# Altium PCB Pannel3.5x3.PcbDoc (part 4 of 4)
Units mil, origin at the board's own origin, x right, y up, seen from the top; angles counter-clockwise.
Board outline 3543.31 x 2771.65 mil, 4 copper layers (SIGNAL, GROUND, PWR, SIGNAL (Bottom)), stack 61.627 mil thick; 234 components, 186 nets, 894 pads, 439 vias.
Unrouted connection lines stored in the file: 4.
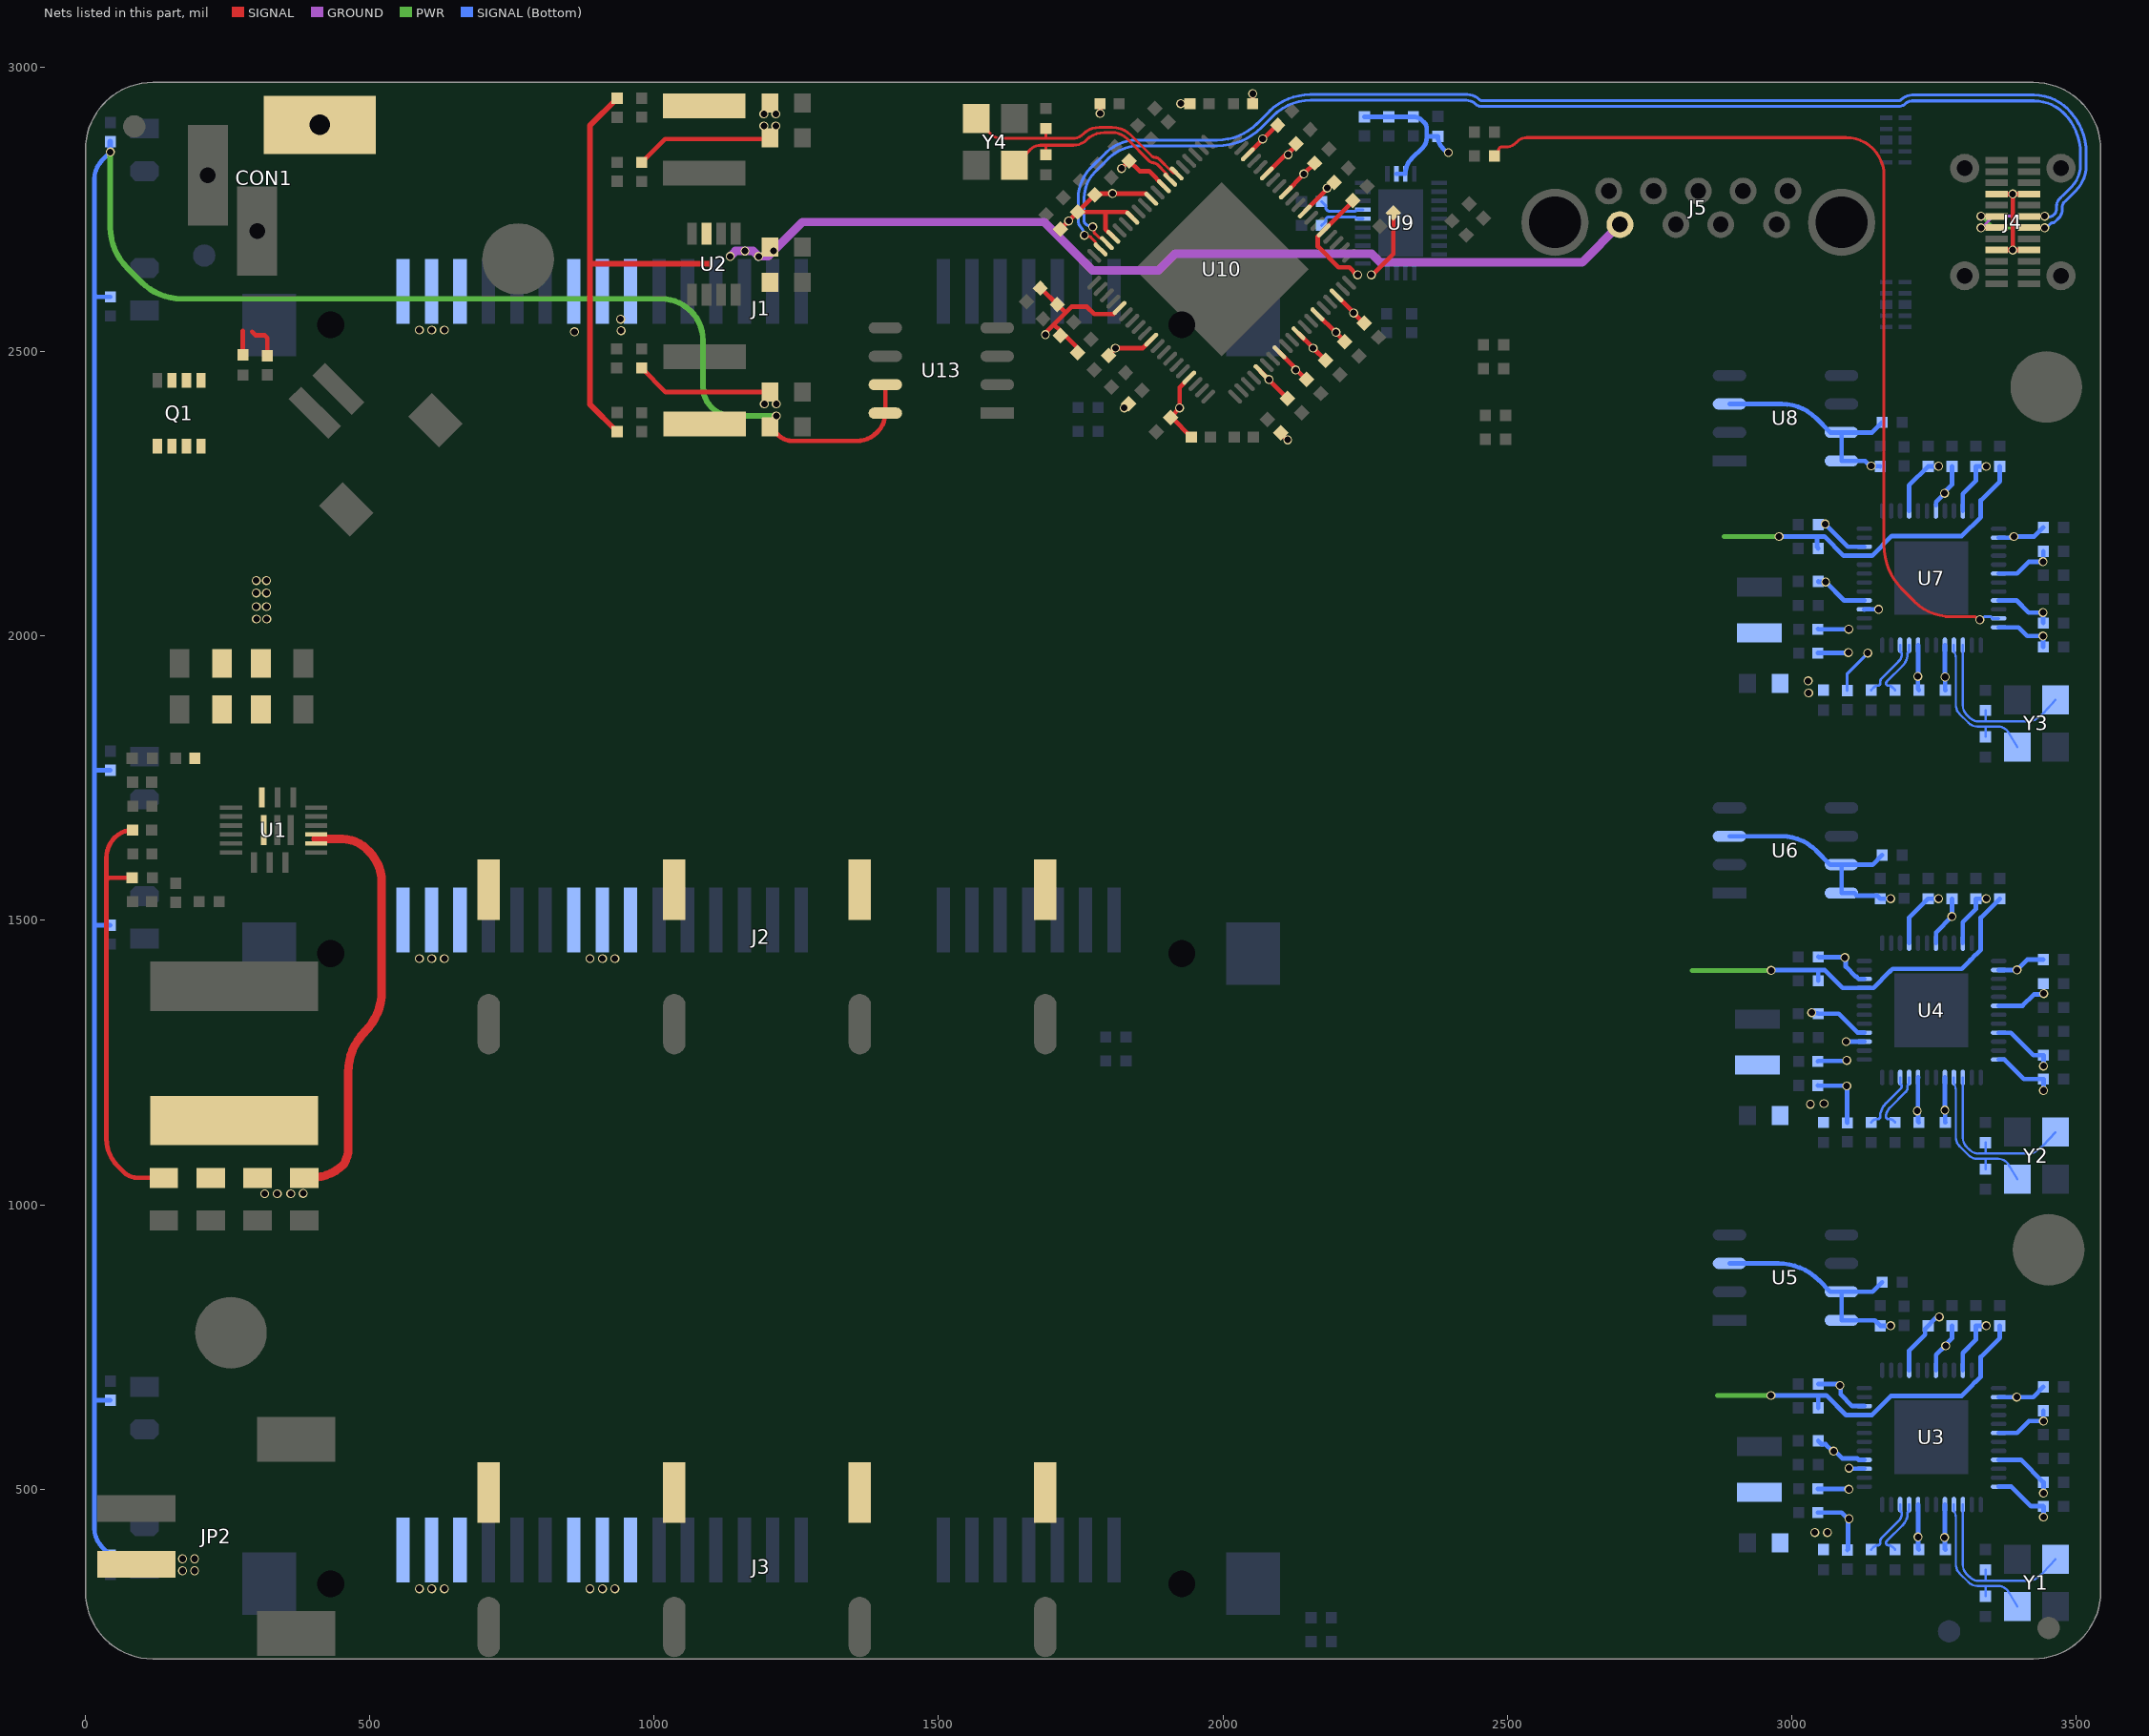
[diagram p6: the nets of this part, all layers, seen from the top]

## Via types
v1: diameter 15.75, hole 11.81, SIGNAL to SIGNAL (Bottom), tented both sides, 439 vias

## Nets (pads, with @x,y where several pads share a name; then routed paths per layer and width w, separated by ;. In a path a pad name is that pad's centre, name@x,y a point inside that pad or via, vN(x,y) a via of type N, cw(c..) or ccw(c..) an arc to the next point about the centre after c; other vN are vias at no path point) (continued)
SSTX4_P: C106.1 U7.23 | length 1664.1
  SIGNAL w5.1: C106.1@2477.72,2844 2483.01,2849.29 ccw(c2478.17,2854.13) 2485.01,2854.13 2485.01,2854.85 cw(c2490.11,2854.85) 2486.5,2858.46 cw(c2490.11,2854.85) 2490.11,2859.95 2497.05,2859.95 ccw(c2497.05,2887.12) 2516.27,2867.91 2518.18,2869.82 cw(c2534.17,2853.83) 2534.17,2876.44 3096.03,2876.44 cw(c3096.03,2809.99) 3142.97,2857.03 cw(c3096.03,2809.99) 3143.02,2856.98 cw(c3096.03,2810) 3162.48,2810 3162.48,2159.9 ccw(c3272.49,2159.9) 3194.64,2082.17 ccw(c3272.49,2159.9) 3194.7,2082.11 3216.08,2060.74 ccw(c3280.73,2125.4) 3280.73,2033.96 3322.79,2033.96 3328.12,2028.63 v1(3331,2028.63)
  SIGNAL (Bottom) w5.1: v1(3331,2028.63) 3333.88,2028.63 3339.21,2033.96 3350.69,2033.96 3353.52,2031.13 U7.23@3364.11,2031.13
SSTX_N: C101.1 U9.21 | length 82.6
  SIGNAL (Bottom) w5.1: C101.1@2173.72,2764 2179.01,2758.71 cw(c2174.17,2753.87) 2181.01,2753.87 ccw(c2187.85,2753.87) 2183.01,2749.03 ccw(c2188.39,2754.41) 2188.39,2746.8 2231.41,2746.8 ccw(c2231.41,2751.63) 2234.82,2748.22 cw(c2238.23,2744.81) 2238.23,2749.63 U9.21@2246.07,2749.63
SSTX_P: C100.1 U9.20 | length 81.1
  SIGNAL (Bottom) w5.1: C100.1@2173.72,2722 2179.45,2727.73 ccw(c2175.67,2731.5) 2181.01,2731.5 2181.01,2731.6 cw(c2186.11,2731.6) 2182.5,2735.21 cw(c2186.11,2731.6) 2186.11,2736.7 2231.41,2736.7 cw(c2231.41,2731.88) 2234.82,2735.29 ccw(c2238.23,2738.7) 2238.23,2733.88 U9.20@2246.07,2733.88
TX1_N: C23.2 U3.33 | length 103.2
  SIGNAL (Bottom) w4.29: C23.2@3182,393.72 3177.04,398.68 ccw(c3170.44,392.08) 3170.44,401.41 cw(c3170.44,405.7) 3167.4,402.67 cw(c3170.44,405.7) 3166.15,405.7 cw(c3170.43,405.7) 3167.4,408.74 3195.31,436.65 ccw(c3174.58,457.38) 3203.9,457.38 cw(c3208.56,457.42) 3205.27,460.71 ccw(c3201.97,464.01) 3206.63,464.01 U3.33@3206.63,472.89
TX1_P: C20.2 U3.34 | length 103.4
  SIGNAL (Bottom) w4.29: C20.2@3140,393.72 3144.96,398.68 cw(c3151.56,392.08) 3151.56,401.41 ccw(c3151.56,405.7) 3154.6,402.67 ccw(c3151.57,405.7) 3155.86,405.7 3155.86,407.83 cw(c3165.29,407.83) 3156,409.5 cw(c3165.29,407.83) 3158.62,414.51 3188.01,443.9 ccw(c3174.49,457.42) 3193.61,457.42 ccw(c3188.95,457.42) 3192.25,460.71 cw(c3195.54,464.01) 3190.88,464.01 U3.34@3190.88,472.89
TX2_N: C22.2 U4.33 | length 104.2
  SIGNAL (Bottom) w4.29: C22.2@3179.12,1147.88 ccw(c3172.53,1141.27) 3172.53,1150.61 3170.44,1150.61 cw(c3170.44,1154.9) 3167.4,1151.86 cw(c3170.44,1154.9) 3166.15,1154.9 cw(c3188.53,1154.9) 3166.15,1155.21 cw(c3188.53,1154.9) 3167.78,1163.29 cw(c3188.53,1154.9) 3172.7,1170.73 3200.92,1198.95 ; C22.2@3179.13,1147.87 C22.2@3182,1145 ; 3200.93,1198.95 ccw(c3193.73,1206.14) 3203.9,1206.14 3203.9,1208.42 cw(c3208.56,1208.42) 3205.27,1211.71 ccw(c3201.97,1215.01) 3206.63,1215.01 U4.33@3206.63,1223.89
TX2_P: C19.2 U4.34 | length 104
  SIGNAL (Bottom) w4.29: C19.2@3140,1145 C19.2@3142.87,1147.87 ; C19.2@3142.88,1147.88 cw(c3149.47,1141.27) 3149.47,1150.61 3151.57,1150.61 ccw(c3151.57,1154.9) 3154.6,1151.86 ccw(c3151.56,1154.9) 3155.86,1154.9 3155.86,1154.96 cw(c3188.37,1154.96) 3155.86,1155.21 cw(c3188.37,1154.96) 3159.14,1169.2 cw(c3188.37,1154.96) 3165.38,1177.96 3192.14,1204.72 ccw(c3188.59,1208.27) 3193.61,1208.27 3193.61,1208.42 ccw(c3188.95,1208.42) 3192.25,1211.71 cw(c3195.54,1215.01) 3190.88,1215.01 U4.34@3190.88,1223.89
TX3_N: C21.2 U7.33 | length 103
  SIGNAL (Bottom) w4.29: C21.2@3182,1905 3177.04,1909.96 ccw(c3170.44,1903.36) 3170.44,1912.7 cw(c3170.44,1916.99) 3167.4,1913.95 cw(c3170.44,1916.99) 3166.15,1916.99 cw(c3170.43,1916.99) 3167.4,1920.02 3195.52,1948.14 ccw(c3175.29,1968.37) 3201.59,1957.1 ccw(c3175.29,1968.37) 3203.9,1968.37 ; 3203.9,1968.42 cw(c3208.56,1968.42) 3205.27,1971.71 ccw(c3201.97,1975.01) 3206.63,1975.01 U7.33@3206.63,1983.89
TX3_P: C18.2 U7.34 | length 103.2
  SIGNAL (Bottom) w4.29: C18.2@3140,1905 3144.96,1909.96 cw(c3151.56,1903.36) 3151.56,1912.7 ccw(c3151.56,1916.99) 3154.6,1913.95 ccw(c3151.57,1916.99) 3155.86,1916.99 3155.86,1919.12 cw(c3165.29,1919.12) 3158.62,1925.79 3188.21,1955.38 ccw(c3175.18,1968.42) 3192.73,1962.8 ccw(c3175.18,1968.42) 3193.61,1968.42 ccw(c3188.95,1968.42) 3192.25,1971.7 cw(c3195.54,1975.01) 3190.88,1975.01 U7.34@3190.88,1983.89
USBD_N: J4.A7 J4.B7 U10.56 | length 2361.9
  SIGNAL w5.1: v1(1756.66,2704.66) 1758.69,2702.62 1766.22,2702.62 1769.64,2699.2 1776.14,2692.7 1776.14,2688.67 U10.56@1785.02,2679.79 ; v1(3333,2738.38) 3333.26,2738.11 3360.39,2738.11 J4.B7@3360.66,2737.85 ; J4.A7@3417.35,2718.16 3417.61,2717.89 3444.73,2717.89 v1(3445,2717.63)
  PWR w5.1: v1(3333,2738.38) 3334.06,2738.38 3344.44,2728 ccw(c3369.49,2753.05) 3369.49,2717.63 v1(3445,2717.63)
  SIGNAL (Bottom) w5.1: 1751.3,2717.54 cw(c1764.61,2730.83) 1745.8,2730.83 1745.8,2769.32 cw(c1822.49,2769.32) 1768.26,2823.55 1794.02,2849.3 ; 1751.35,2717.49 cw(c1743.4,2709.57) 1754.62,2709.57 ccw(c1761.57,2709.57) v1(1756.66,2704.66) ; 1794.03,2849.31 cw(c1848.82,2794.5) 1848.82,2872 1989.99,2872 ccw(c1989.99,2972) 2060.7,2901.29 2081.65,2922.24 cw(c2153.74,2850.15) 2153.74,2952.1 2430.42,2952.1 cw(c2430.42,2924.38) 2450.02,2943.98 ; 2450.03,2943.97 ccw(c2456.87,2950.84) 2456.87,2941.14 3187.93,2941.14 ccw(c3187.93,2948.22) 3192.92,2943.21 ; 3192.95,2943.23 cw(c3211.97,2924.18) 3211.97,2951.1 3426.42,2951.1 cw(c3426.42,2867.17) 3485.77,2926.52 3485.99,2926.3 cw(c3408.36,2848.67) 3518.14,2848.67 3518.14,2828.22 cw(c3453.54,2828.22) 3499.27,2782.59 cw(c3453.54,2828.22) 3499.22,2782.54 3480.24,2763.56 3479.96,2763.56 ccw(c3489.51,2754.01) 3478.45,2761.77 ccw(c3489.51,2754.01) 3476,2754.01 3476,2750.21 cw(c3454.01,2750.21) 3469.56,2734.66 3463.36,2728.46 cw(c3459.4,2732.43) 3459.4,2726.82 ccw(c3459.4,2721.21) 3455.43,2725.18 ; v1(3445,2717.63) ccw(c3445,2724.58) 3449.92,2719.66 3455.43,2725.17
USBD_P: J4.A6 J4.B6 U10.55 | length 2303.7
  SIGNAL w5.1: v1(1771.33,2719.33) 1773.36,2717.29 1773.36,2709.76 1779.74,2703.38 1783.28,2699.84 1787.31,2699.84 U10.55@1796.19,2690.96 ; v1(3333,2717.63) 3333.26,2717.9 3360.39,2717.9 J4.B6@3360.66,2718.16 ; J4.A6@3417.35,2737.84 3417.61,2738.11 3444.73,2738.11 v1(3445,2738.37)
  GROUND w5.1: v1(3333,2717.63) 3334.06,2717.63 3354.81,2738.37 v1(3445,2738.37)
  SIGNAL (Bottom) w5.1: v1(1771.33,2719.33) ccw(c1766.41,2714.41) 1766.41,2721.36 cw(c1766.41,2732.59) 1758.47,2724.65 cw(c1764.68,2730.86) 1755.9,2730.86 1755.9,2769.19 cw(c1822.81,2769.19) 1775.48,2816.48 1798.2,2839.2 cw(c1853,2784.4) 1798.24,2839.24 cw(c1853,2784.4) 1853,2861.9 1990.04,2861.9 ccw(c1990.04,2971.87) 2067.8,2894.11 2088.32,2914.63 cw(c2154.4,2848.55) 2154.4,2942 2428.32,2942 cw(c2428.32,2919.32) 2444.36,2935.36 ccw(c2454.78,2945.78) 2454.78,2931.04 3188,2931.04 ccw(c3188,2948.04) 3200.02,2936.02 cw(c3212.04,2924) 3212.04,2941 3426.24,2941 cw(c3426.24,2866.73) 3478.72,2919.28 ; v1(3445,2738.37) ccw(c3448.52,2741.89) 3448.52,2736.92 3451.62,2736.92 ccw(c3451.62,2751.19) 3461.72,2741.1 ccw(c3451.62,2751.19) 3465.9,2751.19 3465.9,2755.38 cw(c3486.2,2755.38) 3469.96,2767.56 cw(c3486.2,2755.38) 3471.85,2769.73 3475.77,2773.66 3476.06,2773.66 3492.05,2789.65 ccw(c3453.45,2828.25) 3508.04,2828.25 3508.04,2848.54 ccw(c3408.04,2848.54) 3478.75,2919.25
VBUS: C12.2 C13.2 C54.2 C55.2 C60.2 C61.2 C86.2 C87.2 C96.2 J4.A4 J4.A9 J4.B4 J4.B9 J5.1 R9.1 R10.1 R38.1 R39.1 R45.2 U2.7 U3.12 U3.45 U4.12 U4.45 U7.12 U7.45 U9.26 U9.27 | length 4928.1
  SIGNAL w8: J4.B4@3360.66,2678.79 v1(3389,2678.79) ; J4.B9@3360.66,2777.21 v1(3389,2777.21) ; J4.A9@3417.35,2678.79 v1(3389,2678.79) ; J4.A4@3417.35,2777.21 v1(3389,2777.21) ; v1(3389,2678.79) v1(3389,2777.21)
  SIGNAL w10: R10.1@935,2359 R10.1@935,2359.52 887,2407.52 887,2655 ; R9.1@935,2945.48 887,2897.48 887,2655 ; 1097.89,2655 887,2655
  GROUND w15: v1@1133.85,2667.63 1143.28,2677.05 v1(1159.73,2677.05) 1159.87,2676.91 1174.08,2676.91 1183.5,2667.49 v1(1183.71,2667.49) 1183.85,2667.63 1200.37,2667.63 1209.8,2677.05 v1(1210,2677.05) 1260.95,2728 1686,2728 1771.37,2642.63 1886.63,2642.63 1916,2672 2261.84,2672 2276.99,2656.85 2631.55,2656.85 J5.1@2698.2,2723.5
  PWR w8: 2825,1412 v1(2964,1412) ; 2869.18,664.82 v1(2963.83,664.82) ; 2881.02,2175 v1(2978,2175)
  SIGNAL (Bottom) w8: R38.1@2249,2912.73 2249.25,2912.99 R45.2@2335,2912.99 cw(c2335,2891.22) 2350.39,2906.61 2355,2902 cw(c2346.9,2893.9) 2358.35,2893.9 2358.35,2875.43 cw(c2335.18,2875.43) 2357.6,2869.56 cw(c2335.18,2875.43) 2351.57,2859.04 2332.01,2839.49 ccw(c2358.87,2812.62) U9.27@2320.88,2812.62 U9.26@2305.13,2812.62 ; 2359.59,2878.41 C96.2@2378,2878.41 ccw(c2406.87,2878.41) 2386.46,2858 2394.68,2849.77 v1(2396.6,2849.99) ; v1(2963.83,664.82) 3061.18,664.82 3095.63,630.37 U3.45@3127.89,630.37 3127.95,630.43 3141.43,630.43 3174.96,663.96 3298.96,663.96 3314.13,679.13 3314.13,679.23 3324.01,689.11 3324.11,689.11 3332.61,697.61 3332.61,732.61 3366,766 C55.2@3366,787.28 ; v1(2964,1412) 2964.87,1412.87 3047,1412.87 ; v1(2978,2175) 3044,2175 ; C54.2@3047,643 3047,661 ; C60.2@3047,1394 3047,1412.87 ; C86.2@3047,2154 3044.84,2156.16 3044.84,2174.16 3044,2175 ; C61.2@3366,1538.28 3332.61,1504.9 3332.61,1448.61 3324.11,1440.11 3324.01,1440.11 3314.13,1430.23 3314.13,1430.13 3298.96,1414.96 3177.73,1414.96 3173.04,1410.27 3144.2,1381.43 3127.95,1381.43 U4.45@3127.89,1381.37 3089.63,1381.37 3058.13,1412.87 3047,1412.87 ; C87.2@3366,2298.28 3366,2272 3332.61,2238.61 U7.12@3332.61,2220.11 3332.61,2209.13 3299.48,2176 3176.26,2176 3141.63,2141.37 3091.63,2141.37 3058,2175 3044,2175
  other v1: 1133.71,2667.49
VCC1V0: C14.2 C15.2 C115.2 C116.2 C117.2 C118.2 C119.2 C120.2 C121.2 C122.2 C123.2 C124.2 C125.2 C126.2 L2.1 R14.1 U10.5 U10.8 U10.11 U10.14 U10.27 U10.30 U10.33 U10.36 U10.48 U10.51 U10.54 U10.67 | length 1236.2
  SIGNAL w8: R14.1@978,2832.73 1019.3,2874.03 1202.03,2874.03 C14.2@1204,2876 ; C116.2@1714.53,2715.47 v1(1729,2730) ; v1(1729,2730) 1729.05,2730 C115.2@1739.05,2740 ; C120.2@1799,2493 1799,2493.53 1811.06,2505.59 1811.06,2507.65 1812.59,2506.13 1859.04,2506.13 1874.03,2521.11 U10.67@1874.12,2521.11 ; U10.54@1807.29,2702.06 1793.63,2715.72 1793.63,2745.47 ; U10.51@1840.74,2735.51 1830.78,2745.47 1793.63,2745.47 ; U10.48@1874.12,2768.89 1874.03,2768.89 1864.84,2778.07 1785.39,2778.07 1782.79,2775.47 C125.2@1774.53,2775.47 C115.2@1744.53,2745.47 1752.22,2746.05 1769.23,2745.47 1793.63,2745.47 ; U10.36@2043.96,2846.81 2043.96,2846.9 2070,2872.94 v1(2070,2874) 2071,2874 2095.47,2898.47 C118.2@2096.47,2898.47 ; U10.5@2066.24,2465.47 2066.24,2465.38 v1@2081.05,2450.56 ; U10.33@2077.34,2813.43 2111.95,2848.05 2113.52,2846.48 v1(2114.87,2846.48) 2114.87,2848.57 2128.47,2862.17 C119.2@2128.47,2865.47 ; U10.8@2099.61,2498.84 2126.52,2471.93 2126.52,2469.48 v1(2128,2468) 2129.5,2468 2145.97,2451.53 C126.2@2147.47,2451.53 ; U10.30@2110.78,2779.99 2142.4,2811.6 v1(2142.4,2812.4) C123.2@2161.47,2831.47 ; C121.2@2113.47,2417.53 2113.47,2418.06 2081.05,2450.48 v1@2081.05,2450.56 ; U10.11@2132.99,2532.22 2158.8,2506.41 v1(2158.8,2506.2) C117.2@2180.47,2484.53 ; U10.27@2144.16,2746.61 2183.48,2785.92 v1(2183.48,2787.72) ; U10.14@2166.43,2565.66 2166.52,2565.66 2198.18,2534 v1(2199,2534) 2199,2533.5 2214.47,2518.03 C124.2@2214.47,2517.53 ; v1@2185,2787.21 2195.26,2797.47 C122.2@2195.47,2797.47 ; v1@2081.05,2450.56 v1(2081.05,2451.02) 2081.81,2450.26 2081.81,2449.81 v1@2081.05,2450.56
  other v1: 1811.06,2506.13 1806,2778 1193.03,2896.94 1214.03,2896.94 1193.03,2917.94 1214.03,2917.94
VCC1V2-A: C32.2 C33.2 C38.2 C39.2 C40.2 C41.2 C42.2 C43.2 C44.2 C45.2 L4.2 U3.4 U3.10 U3.18 U3.21 U3.24 U3.29 U3.32 U3.40 | length 809.8
  SIGNAL (Bottom) w8: C43.2@3047,585 3052.84,579.16 3059.75,579.16 3071.9,567 v1(3074,567) 3076.1,567 3088.96,554.14 3115.66,554.14 3118.17,551.63 U3.40@3127.89,551.63 ; U3.4@3206.63,709.11 3206.69,709.17 3206.69,743.69 3234.81,771.81 3234.81,782.1 3254.23,801.52 3258.11,801.52 v1(3259.59,803) ; U3.32@3222.38,472.89 3222.44,472.83 v1(3222.44,416) 3222.44,395.56 C42.2@3224,394 ; U3.29@3269.62,472.89 3269.62,415.62 v1(3269,415) 3269.61,414.39 3269.61,394.61 C41.2@3270.22,394 ; U3.10@3301.12,709.11 3301.12,739.37 3324,762.25 C40.2@3324,787.28 v1(3342.28,787.28) ; U3.24@3364.11,504.39 3386.61,504.39 3421,470 C39.2@3442.84,470 3442.92,469.92 3442.92,451.08 v1(3443,451) ; U3.21@3364.11,551.63 3403.21,551.63 C38.2@3442.84,512 3442.92,511.92 3442.92,493.08 v1(3443,493) ; U3.18@3364.11,598.87 3396.4,598.87 3417.24,619.72 v1(3442.84,619.72) C44.2@3442.84,638
  other v1: 3041,424 3063,424
VCC1V2-B: C34.2 C35.2 C46.2 C47.2 C48.2 C49.2 C50.2 C51.2 C52.2 C53.2 L5.2 U4.4 U4.10 U4.18 U4.21 U4.24 U4.29 U4.32 U4.40 | length 798.6
  SIGNAL (Bottom) w8: v1(3035.28,1338) 3036.28,1337 3046,1337 C51.2@3047,1336 3083,1336 3116.31,1302.69 3127.83,1302.69 U4.40@3127.89,1302.63 ; U4.4@3206.63,1460.11 3206.63,1504.91 C53.2@3240,1538.28 v1(3258.28,1538.28) ; U4.32@3222.38,1223.89 3222.32,1223.83 3222.32,1166.32 v1(3221,1165) 3222.48,1163.52 3222.48,1146.52 C48.2@3224,1145 ; U4.29@3269.62,1223.89 3269.56,1223.83 v1(3269.56,1166.56) 3269.89,1166.23 3269.89,1145.33 C49.2@3270.22,1145 ; U4.10@3301.12,1460.11 3301.12,1497.12 3324,1520 C50.2@3324,1538.28 v1(3342.14,1538.28) ; U4.24@3364.11,1255.39 3373.83,1255.39 3408.21,1221 C47.2@3442.84,1221 3442.92,1220.92 3442.92,1201.08 v1(3443,1201) ; U4.21@3364.11,1302.63 3364.17,1302.57 3385.43,1302.57 3425,1263 C46.2@3442.84,1263 3442.92,1262.92 3442.92,1244.08 v1(3443,1244) ; U4.18@3364.11,1349.87 3406.05,1349.87 3425.99,1369.82 3441.94,1369.82 v1(3443.42,1371.3)
  other v1: 3033,1177 3057,1178
VCC1V2-C: C75.2 C76.2 C78.2 C79.2 C80.2 C81.2 C82.2 C83.2 C84.2 C85.2 L6.2 U7.4 U7.10 U7.18 U7.21 U7.24 U7.29 U7.32 U7.40 | length 783.4
  SIGNAL (Bottom) w8: C85.2@3047,2096 3047.5,2095.5 3059.5,2095.5 3092.37,2062.63 U7.40@3127.89,2062.63 ; U7.4@3206.63,2220.11 3206.63,2264.91 3240.36,2298.64 3240.54,2298.46 3258.1,2298.46 v1(3258.28,2298.64) ; U7.32@3222.38,1983.89 3222.44,1983.83 3222.44,1929.44 v1(3222,1929) 3222,1907 C78.2@3224,1905 ; U7.29@3269.62,1983.89 3269.69,1983.83 3269.69,1928.31 v1(3270,1928) 3270.11,1927.89 3270.11,1905.11 C83.2@3270.22,1905 ; U7.10@3301.12,2220.11 3301.12,2250.12 3324,2273 C80.2@3324,2298.28 v1(3342.28,2298.28) ; U7.24@3364.11,2015.39 3399.2,2015.39 3414.59,2000 v1(3442,2000) 3442.42,1999.58 3442.42,1981.42 C81.2@3442.84,1981 ; U7.21@3364.11,2062.63 3395.72,2062.63 3417.07,2041.28 v1(3441.91,2041.28) ; U7.18@3364.11,2109.87 3396.48,2109.87 3417.32,2130.72 v1(3442,2130.72) ; v1@3442.37,2040.83 3442.37,2023.46 C84.2@3442.84,2023 ; v1@3442.84,2130.72 C82.2@3442.84,2149
  other v1: 3030,1900 3029,1921 3060,2095
VCC3V3: C16.2 C17.2 C110.2 C111.2 C112.2 C113.2 C114.2 L3.1 R8.2 R15.1 R20.1 R21.1 R22.1 R23.1 R24.1 R25.1 R40.2 R41.2 R42.2 R43.2 R48.2 R50.2 R52.2 R54.2 R55.2 U10.17 U10.24 U10.46 U10.62 U10.73 U13.7 U13.8 | length 5676.3
  SIGNAL w8: R15.1@978,2471.54 1020.54,2429 C16.2@1204,2429 ; C17.2@1204,2368 1219.1,2352.9 ccw(c1243,2376.8) 1243,2343 1356.09,2343 ccw(c1356.09,2393.49) 1391.76,2357.76 ; 1391.79,2357.79 1392.84,2358.84 ccw(c1359.68,2392) U13.8@1406.57,2392 U13.7@1406.57,2442 ; R8.2@1678.83,2611.83 1680.17,2611.83 C112.2@1709,2583 1723.56,2568.45 ; v1(1688,2530) 1689.48,2531.48 1689.48,2534.37 1703.02,2547.91 ; R41.2@1744.34,2498.34 1744.34,2506.66 1725.95,2525.05 1725.88,2525.05 1722.6,2528.34 R42.2@1714.34,2528.34 1714.34,2536.6 1703.02,2547.91 ; v1(1784.27,2918.73) R50.2@1784.27,2936 ; U10.62@1818.47,2576.76 1807.88,2566.18 1773.82,2566.18 1761,2579 1734.11,2579 1723.56,2568.45 ; v1(1822,2822) C114.2@1835.53,2835.47 ; v1(1826.69,2401.16) 1826.93,2401.16 1834.1,2408.34 R40.2@1834.34,2408.34 ; C114.2@1835.53,2835.47 1853.53,2817.47 1870.08,2817.47 U10.46@1896.39,2791.16 ; C110.2@1908,2384 1910.54,2384 R43.2@1944.54,2350 ; C110.2@1908,2384.58 v1@1924,2400.58 ; v1@1924,2400 v1@1924,2400.58 ; v1(1926,2936) R52.2@1942.27,2936 ; U10.73@1940.94,2454.29 1924,2437.36 v1(1924,2401.16) v1@1924,2400.58 ; R54.2@2052.46,2936 v1(2052.46,2953.54) ; R48.2@2101.83,2357.17 v1(2114,2345) ; U10.17@2199.81,2599.04 2199.81,2598.95 2230,2568.76 v1(2230,2568) 2230.5,2568 2247.97,2550.53 C111.2@2248.47,2550.53 ; C113.2@2228.47,2765.47 2228.47,2764.17 2167,2702.7 2167,2684.98 2203.58,2648.4 2222.26,2648.4 2235.43,2635.23 v1(2237.2,2635.23) ; v1(2261,2635) 2262.8,2635 2299.83,2672.03 R55.2@2299.83,2743.83 ; 1703.02,2547.91 1723.56,2568.45
  PWR w10: v1(44,2851) 44,2718.42 ccw(c144,2718.42) 73.29,2647.71 98.71,2622.29 ccw(c169.42,2693) 169.42,2593 1012.59,2593 cw(c1012.59,2519.59) 1064.5,2571.5 cw(c1012.59,2519.59) 1086,2519.59 1086,2438.17 ccw(c1137.11,2438.17) 1100.97,2402.03 ; 1101,2402 ccw(c1137.11,2438.17) 1137.11,2387.06 v1(1214.97,2387.06)
  SIGNAL (Bottom) w8: R21.1@44,383.73 30,397.73 cw(c63.8,431.53) 16,431.53 16,655 ; R20.1@44,656.27 17.27,656.27 16,655 ; R23.1@44,1491.73 17.27,1491.73 16,1493 ; R22.1@44,1764.27 17.73,1764.27 16,1766 ; R25.1@44,2596.46 19.54,2596.46 16,2600 ; v1(44,2851) 30,2837 ccw(c63.8,2803.2) 16,2803.2 16,2600 ; 16,655 16,1493 ; 16,1493 16,1766 ; 16,1766 16,2600
  SIGNAL (Bottom) w10: v1(44,2851) R24.1@44,2869.27
  other v1: 1193.97,2408.06 1214.97,2408.06
VCC3V3-A: C36.2 C56.2 C57.2 C58.2 C59.2 R26.1 R28.1 R32.1 U3.7 U3.14 U3.39 U3.46 U5.3 U5.7 U5.8 | length 930.9
  SIGNAL (Bottom) w8: U5.3@2890.97,897 2976.71,897 cw(c2976.71,797) 3047.42,867.71 3068.13,847 U5.7@3087.82,847 ; R28.1@3046.02,459 3087.9,459 3098.9,448 v1(3101,448) ; R26.1@3046.02,501 3046.6,500.42 3100.25,500.42 v1(3100.83,499.84) ; C56.2@3047,685 v1@3080.24,685 ; v1(3085,682.34) 3086.48,680.86 3086.48,666.52 3106.82,646.18 3127.83,646.18 U3.46@3127.89,646.12 ; R32.1@3098,393.14 3099.52,394.66 v1@3099.52,446.52 ; v1(3101,537) 3102.06,535.94 3127.83,535.94 U3.39@3127.89,535.88 ; C58.2@3159.28,864 3142.28,847 U5.7@3087.82,847 ; v1(3174.28,787.28) C36.2@3156,787.28 3146.28,797 U5.8@3087.82,797 U5.7@3087.82,847 ; U3.7@3253.87,709.11 3253.87,736.07 v1@3270.4,752.6 ; v1@3271,754.1 3282,765.1 C59.2@3282,787.28 ; U3.14@3364.11,661.87 3424.7,661.87 ; v1(3396,662) 3424.84,662 C57.2@3442.84,680
  other v1: 3271,752
VCC3V3-B: C37.2 C62.2 C63.2 C64.2 C65.2 R27.1 R29.1 R33.1 U4.7 U4.14 U4.39 U4.46 U6.3 U6.7 U6.8 | length 913.3
  SIGNAL (Bottom) w8: U6.3@2890.97,1648 2982.78,1648 cw(c2982.78,1562.64) 3043.1,1623.04 cw(c2982.78,1562.64) 3043.13,1623 3068.13,1598 U6.7@3087.82,1598 ; R29.1@3046.02,1210 3046.52,1209.5 3096.5,1209.5 3097.5,1208.5 3097.5,1144.64 R33.1@3098,1144.14 ; R27.1@3046.02,1252 3047.02,1253 3096,1253 v1(3097,1254) ; C62.2@3047,1436 3047.58,1435.42 3093.23,1435.42 v1(3093.81,1434.84) ; v1@3093.55,1433 3095.3,1431.26 3095.3,1418.74 3113.1,1400.93 3114.36,1400.93 3118.17,1397.12 U4.46@3127.89,1397.12 ; v1(3095.93,1287.01) 3096.05,1286.88 U4.39@3127.89,1286.88 ; C63.2@3159.28,1615 3142.28,1598 U6.7@3087.82,1598 ; v1(3174.28,1538.28) C37.2@3156,1538.28 3150.85,1543.43 3115.23,1543.43 3110.67,1548 U6.8@3087.82,1548 U6.7@3087.82,1598 ; U4.7@3253.87,1460.11 3253.87,1478.87 v1(3282,1507) C65.2@3282,1538.28 ; U4.14@3364.11,1412.87 v1(3396.34,1412.87) 3414.48,1431 C64.2@3442.84,1431
  other v1: 3097,1209
VCC3V3-C: C77.2 C88.2 C89.2 C90.2 C91.2 R34.1 R35.1 R37.1 U7.7 U7.14 U7.39 U7.46 U8.3 U8.7 U8.8 | length 882
  SIGNAL (Bottom) w5.1: R34.1@3046.02,2012 R34.1@3046.57,2012.55 ; R37.1@3098,1904.14 3098,1934 v1(3134,1970)
  SIGNAL (Bottom) w8: U8.3@2890.97,2408 2982.78,2408 cw(c2982.78,2322.64) 3043.1,2383.04 cw(c2982.78,2322.64) 3043.13,2383 3068.13,2358 U8.7@3087.82,2358 ; R35.1@3046.02,1970 3046.52,1970.5 3099.5,1970.5 v1(3100,1971) ; R34.1@3046.57,2012.55 3047.12,2012 v1(3100.56,2012) ; v1(3059,2197) 3098.88,2157.12 U7.46@3127.89,2157.12 ; U7.39@3127.89,2046.88 U7.39@3127.89,2046.88 3152.94,2046.94 v1(3153,2047) ; C77.2@3156,2298.28 3155.64,2298.64 3140.36,2298.64 v1(3140,2299) 3138.35,2299 3129.35,2308 U8.8@3087.82,2308 U8.7@3087.82,2358 ; C90.2@3159.28,2376 3141.28,2358 U8.7@3087.82,2358 ; U7.7@3253.94,2229.89 3253.94,2235.45 3269,2250.51 3269,2253.1 3282,2266.1 C91.2@3282,2298.28 ; U7.14@3364.11,2172.87 3364.17,2172.93 3386.83,2172.93 3388.9,2175 v1(3391,2175) 3426.84,2175 C88.2@3442.84,2191
  other v1: 3269,2251
VCC5V: C2.1 C7.2 C8.2 C9.2 C10.2 E1.1 E2.1 E5.1 E6.1 J1.P7 J1.P8 J1.P9 J2.P7 J2.P8 J2.P9 J3.P7 J3.P8 J3.P9 L1.1 R5.2 U1.5 U1.6 | length 1506.2
  SIGNAL w8: 67.42,1057.58 57.3,1067.7 cw(c106.31,1116.71) 37,1116.71 37,1571 ; 67.44,1057.56 ccw(c92,1082.16) 92,1047.4 C8.2@138,1047.4 ; C2.1@82.41,1575 41,1575 37,1571 ; R5.2@83.27,1659 ccw(c83.27,1614.9) 52.08,1646.08 ccw(c88.5,1609.67) 37,1609.67 37,1571
  SIGNAL w15: C7.2@385,1047.4 396.34,1047.4 ccw(c396.34,1129.57) 454.44,1071.46 ccw(c410.9,1098.83) 462.33,1098.83 462.33,1233.5 cw(c562.33,1233.5) 491.61,1304.21 491.71,1304.31 ccw(c421,1375.02) 521,1375.02 521,1567.94 ccw(c445.94,1567.94) 499.01,1621.01 494.73,1625.3 ; 405,1643 452,1643 cw(c452,1582.57) 494.72,1625.31
  other v1: 887.2,324.79 909.2,324.79 931.2,324.79 315.29,1019.47 337.29,1019.47 361.29,1019.47 383,1020 887.2,1432.77 909.2,1432.77 931.2,1432.77 860,2535 942,2537 941,2557
VCC12V: C3.2 C4.2 C5.2 C6.2 E3.1 E4.1 E7.1 E8.1 J1.P13 J1.P14 J1.P15 J2.P13 J2.P14 J2.P15 J3.P13 J3.P14 J3.P15 JP2.1 Q1.3 R3.1 U1.12 U1.19
  other v1: 587.2,324.79 609.2,324.79 631.2,324.79 171,356.57 192,356.57 171,377.57 192,377.57 587.2,1432.77 609.2,1432.77 631.2,1432.77 301,2030 319,2030 300.47,2051.71 318.47,2051.71 300.47,2075.71 318.47,2075.71 300.47,2097.71 318.47,2097.71 587.2,2538.03 609.2,2538.03 631.2,2538.03
VIN: C127.1 CON1.1 Q1.2 R11.1 | length 105.6
  SIGNAL w8: C127.1@277,2494.43 277,2537 ; 293,2535 299,2529 315.31,2529 320,2524.31 R11.1@320,2492.73
XIN: C109.1 U10.45 Y4.3 | length 338.3
  SIGNAL w5.1: Y4.3@1633.46,2827.66 1661.4,2855.6 cw(c1679.27,2837.73) 1679.27,2863 1688,2863 ; C109.1@1689,2846.43 1689,2862 1688,2863 ; U10.45@1903.05,2806.7 ccw(c1893.13,2806.7) 1900.14,2813.72 1884.57,2829.29 ccw(c1878.03,2822.76) 1878.03,2832 cw(c1878.03,2841.24) 1871.5,2834.71 1831.6,2874.6 ccw(c1805.74,2848.74) 1805.74,2885.31 1791.52,2885.31 ccw(c1791.52,2841.34) 1760.43,2872.43 cw(c1737.64,2895.26) 1737.64,2863 1688,2863
XIN-A: C71.1 U3.28 Y1.3 | length 269.3
  SIGNAL (Bottom) w4: U3.28@3285.37,472.89 3285.37,463.05 3287.11,458.93 cw(c3266.84,450.38) 3288.84,450.38 3288.84,367.68 ccw(c3310.84,367.68) 3295.24,352.16 3311.02,336.39 ccw(c3326.52,352) 3326.52,330 3341,330 ; C71.1@3341,311.72 3341,330 ; Y1.3@3397,294 3382.48,317.59 ccw(c3362.68,308) 3362.75,330 3341,330
XIN-B: C73.1 U4.28 Y2.3 | length 269.3
  SIGNAL (Bottom) w4: U4.28@3285.37,1223.89 3285.37,1214.05 3287.11,1209.93 cw(c3266.84,1201.38) 3288.84,1201.38 3288.84,1118.68 ccw(c3310.84,1118.68) 3295.24,1103.16 3311.02,1087.39 ccw(c3326.52,1103) 3326.52,1081 3341,1081 ; C73.1@3341,1062.72 3341,1081 ; Y2.3@3397,1045 3382.48,1068.59 ccw(c3362.68,1059) 3362.75,1081 3341,1081
XIN-C: C95.1 U7.28 Y3.3 | length 269.3
  SIGNAL (Bottom) w4: U7.28@3285.37,1983.89 3285.37,1974.05 3287.11,1969.93 cw(c3266.84,1961.38) 3288.84,1961.38 3288.84,1878.68 ccw(c3310.84,1878.68) 3295.24,1863.16 3311.02,1847.39 ccw(c3326.52,1863) 3326.52,1841 3341,1841 ; C95.1@3341,1822.72 3341,1841 ; Y3.3@3397,1805 3382.48,1828.59 ccw(c3362.68,1819) 3362.75,1841 3341,1841
XOUT: C108.1 U10.44 Y4.1 | length 419.6
  SIGNAL w5.1: Y4.1@1566.54,2908.37 1592.36,2882.54 ccw(c1610.57,2900.75) 1610.57,2875 1690,2875 ; Y4.1@1571.86,2890.65 cw(c1562.4,2888.99) Y4.1@1572,2889 ; C108.1@1689,2892.28 1689,2876 1690,2875 ; 1838.01,2881.06 ccw(c1805.74,2848.74) 1805.74,2894.41 1782.55,2894.41 ccw(c1782.55,2855.46) 1754.99,2882.99 cw(c1735.69,2902.31) 1735.69,2875 1690,2875 ; 1838.04,2881.04 1840.54,2878.54 1875.02,2844.05 ccw(c1881.56,2850.59) 1881.56,2841.35 cw(c1881.56,2832.1) 1888.09,2838.64 1909.5,2817.23 ccw(c1918.66,2826.39) U10.44@1918.66,2813.43
XOUT-A: C70.1 U3.27 Y1.1 | length 318
  SIGNAL (Bottom) w4: U3.27@3301.12,472.89 3301.12,366.71 ccw(c3323.12,366.71) 3307.52,351.19 3313.31,345.4 ccw(c3328.83,361) 3328.83,339 3341,339 ; C70.1@3341,358.28 3341,339 ; Y1.1@3463.93,376.68 3442.31,353.09 3431.01,343.92 cw(c3417.14,361) 3417.14,339 3341,339
XOUT-B: C72.1 U4.27 Y2.1 | length 318
  SIGNAL (Bottom) w4: U4.27@3301.12,1223.89 3301.12,1117.71 ccw(c3323.12,1117.71) 3307.52,1102.19 3313.31,1096.4 ccw(c3328.83,1112) 3328.83,1090 3341,1090 ; C72.1@3341,1109.28 3341,1090 ; Y2.1@3463.93,1127.68 3442.31,1104.09 3431.01,1094.92 cw(c3417.14,1112) 3417.14,1090 3341,1090
XOUT-C: C94.1 U7.27 Y3.1 | length 318
  SIGNAL (Bottom) w4: U7.27@3301.12,1983.89 3301.12,1877.71 ccw(c3323.12,1877.71) 3307.52,1862.19 3313.31,1856.4 ccw(c3328.83,1872) 3328.83,1850 3341,1850 ; C94.1@3341,1869.28 3341,1850 ; Y3.1@3463.93,1887.68 3442.31,1864.09 3431.01,1854.92 cw(c3417.14,1872) 3417.14,1850 3341,1850
pads on no net: J1. J1.P1 J1.P2 J1.P3 J1.SH2 J2. J2.P1 J2.P2 J2.P3 J2.SH1 J2.SH2 J3. J3.P1 J3.P2 J3.P3 J3.SH1 J3.SH2 J4.A8 J4.B8 JP1.0 JP2.0 MR1.Mark MR2.Mark MR3.Mark MR4.Mark TP1.4 TP2.4 TP3.4 TP4.4 U1.4 U1.7 U1.9 U1.18 U3.16 U3.17 U3.25 U3.35 U3.41 U3.48 U4.16 U4.17 U4.25 U4.35 U4.41 U4.48 U7.16 U7.17 U7.25 U7.35 U7.41 U7.48 U9.11 U9.12 U9.14 U9.15 U9.16 U9.22 U10.2 U10.21 U10.39 U10.42 U10.57 U10.58 U10.59 U10.60 U10.61 U10.63 U10.64 U10.76

## Polygon pours and split planes (outlines as drawn)
VBUS on PWR "VBUS_L03_P015" (solid, remove dead copper, pour order 15): 2388,2936.67 2318.06,2866.73 2318.06,2419.94 2414,2324 2674,2324 2758.28,2239.72 2758.28,277.72 2846,190 3559,190 3633,264 3633,2819 3422,3030 2481.33,3030
VCC1V0 on PWR "VCC1V0_L03_P010" (solid, pour order 10): 1193,2960 1175,2942 1175,2573 1213,2535 1749,2535 1844,2440 2129,2440 2215,2526 2206,2535 2206,2797 2122,2881 1920,2881 1850,2811 1768,2811 1743,2836 1743,2924 1707,2960
GND on PWR "GND_L03_P019" (solid, remove dead copper, pour order 19): 118.36,201.69 cw(c118.4,319.85) 0.25,319.8 0.25,2855.24 cw(c118.34,2855.26) 118.36,2973.35 3425.45,2973.35 cw(c3425.54,2855.33) 3543.56,2855.24 3543.56,319.8 cw(c3425.47,319.78) 3425.45,201.69
VCC3V3 on PWR "VCC3V3_L03_P008" (solid, remove dead copper, pour order 8): 1178,2494.53 1178,2357 1195,2340 2235,2340 2315,2420 2315,2868 2220,2963 1788,2963 1753,2928 1753,2838 1772,2819 1849,2819 1917.42,2887.42 2125.58,2887.42 2215,2798 2215,2526 2121,2432 1842.01,2432 1743.18,2530.83 1214.31,2530.83
VCC3V3-B on PWR "VCC3V3-B_L03_P003" (solid, remove dead copper, pour order 3): 3096,1462 3081,1447 3081,1206 3099,1188 3368,1188 3396.34,1216.34 3396.34,1469.82 3341.16,1525 3257,1525 3218,1564 3152,1564 3145,1557 3145,1542 3165,1522 3205,1522 3216,1511 3253.69,1511 3257.69,1507 3257.69,1487.69 3232,1462 3188.51,1462
VCC5V on PWR "VCC5V_L03_P017" (solid, remove dead copper, pour order 17): 965,338 965,315 944,294 695,294 632,357 398,357 271,484 271,2391 375,2495 703,2495 775,2567 981,2567 1005,2543 1005,2344 973,2312 578,2312 524,2258 524,1748 596,1676 910,1676 958,1628 958,1253 917,1212 592,1212 515,1135 515,634 591,558 916,558 965,509
VCC3V3-A on PWR "VCC3V3-A_L03_P001" (solid, remove dead copper, pour order 1): 3120.5,712 3084,712 3071,699 3071,619 3089,601 3089,449 3105,433 3367,433 3402,468 3402,690 3329,763 3280,763 3232,811 3131,811 3126,806 3126,790.1 3143.1,773 3220,773 3221,772 3236,772 3252,756 3252,723 3241,712
VCC3V3-C on PWR "VCC3V3-C_L03_P000" (solid, remove dead copper, pour order 0): 3053,2208 3035,2190 3035,2138 3055,2118 3079,2118 3090,2107 3090,1960 3107,1943 3372,1943 3406,1977 3406,2233 3372,2267 3269,2267 3226,2310 3136,2310 3132,2306 3132,2276 3147,2261 3239,2261 3249,2251 3249,2198 3241,2190 3148,2190 3129,2209 3118,2209 3054,2209
VCC1V2-A on PWR "VCC1V2-A_L03_P007" (solid, remove dead copper, pour order 7): 3065,601 3032,570 3032,401 3059,374 3436,374 3477,415 3477,770 3436,811 3232,811 3280,763 3329,763 3402,690 3402,468 3367,433 3105,433 3089,449 3089,601
VCC1V2-C on PWR "VCC1V2-C_L03_P004" (solid, remove dead copper, pour order 4): 3076,2109 3082,2103 3082,1958 3102,1938 3375.83,1938 3413,1975.17 3413,2235 3377,2271 3270,2271 3231,2310 3422,2310 3476,2256 3476,1939 3425,1888 3028,1888 3007,1909 3007,2099 3017,2109
VCC1V2-B on PWR "VCC1V2-B_L03_P006" (solid, remove dead copper, pour order 6): 3066,1354 3074,1346 3074,1199 3093,1180 3376,1180 3406,1210 3406,1469 3344.74,1530.26 3251.74,1530.26 3218,1564 3384,1564 3455,1493 3455,1188 3410,1143 3050,1143 3013,1180 3013,1348 3019,1354
GND on GROUND "GND_L02_P018" (solid, pour order 18): 118.36,201.69 cw(c118.4,319.85) 0.25,319.8 0.25,2855.24 cw(c118.34,2855.26) 118.36,2973.35 3425.45,2973.35 cw(c3425.54,2855.33) 3543.56,2855.24 3543.56,319.8 cw(c3425.47,319.78) 3425.45,201.69
VCC12V on GROUND "VCC12V_L02_P014" (solid, pour order 14): 632,2585 663,2554 663,2421 637,2395 506,2395 438,2327 438,1688 620,1506 639,1487 639,1344 621,1326 438,1143 438,492 552,378 625,378 646,357 646,239 631,224 123,224 70,277 70,432 159,521 238,600 238,2503 320,2585
VCC5V on SIGNAL "VCC5V_L01_P024" (solid, pour order 24): 867,1382.67 875,1374.67 966,1374.67 992,1400.67 1733,1400.67 1752,1419.67 1752,1588.67 1735,1605.67 1118,1605.67 1099,1586.67 1099,1479.67 1063,1443.67 878,1443.67 867,1432.67
VCC5V on SIGNAL "VCC5V_L01_P022" (solid, pour order 22): 867,323 875,315 966,315 992,341 1733,341 1752,360 1752,529 1735,546 1118,546 1099,527 1099,420 1063,384 878,384 867,373
GND on SIGNAL "GND_L01_P026" (solid, pour order 26): 544,297.33 544,212.33 560,196.33 857,196.33 1731,196.33 1755,220.33 1755,309.33 1737,327.33 997,327.33 979,309.33 869,309.33 860,318.33 860,353.33 829,384.33 717.74,384.33 643.74,310.33 557,310.33
GND on SIGNAL "GND_L01_P025" (solid, pour order 25): 544,1357 544,1272 560,1256 857,1256 1731,1256 1755,1280 1755,1369 1737,1387 997,1387 979,1369 869,1369 860,1378 860,1413 829,1444 717.74,1444 643.74,1370 557,1370
VCC12V on SIGNAL "VCC12V_L01_P023" (solid, pour order 23): 640,1374.67 715,1449.67 1062,1449.67 1090,1477.67 1090,1586.67 1072,1604.67 574,1604.67 541,1571.67 541,1386.67 553,1374.67
VCC12V on SIGNAL "VCC12V_L01_P021" (solid, pour order 21): 640,315 715,390 1062,390 1090,418 1090,527 1072,545 574,545 541,512 541,327 553,315

## Keep-outs
Keep-Out Layer:
  lines w0.5: 0.25,319.8 ccw(c118.4,319.85) 118.36,201.69 3425.45,201.69 ccw(c3425.54,319.71) 3543.56,319.8 3543.56,2855.24 ccw(c3425.54,2855.33) 3425.45,2973.35 118.36,2973.35 ccw(c118.4,2855.19) 0.25,2855.24 0.25,319.8 ; 512.06,668.11 ccw(c630.15,668.09) 630.17,550 2638.05,550 ccw(c2638.14,668.02) 2756.16,668.11 2756.16,1101.57 ccw(c2638.14,1101.67) 2638.05,1219.69 630.17,1219.68 ccw(c630.15,1101.6) 512.06,1101.57 512.06,668.11 ; 512.06,1776.06 ccw(c630.21,1776.11) 630.17,1657.95 2638.05,1657.95 ccw(c2638.07,1776.04) 2756.16,1776.06 2756.16,2209.57 ccw(c2638.07,2209.59) 2638.05,2327.68 630.17,2327.68 ccw(c630.21,2209.52) 512.06,2209.57 512.06,1776.06

## Other copper
SIGNAL:
  region net VIN: 221,2447 211,2437 153,2437 141,2449 141,2606 154,2619 341,2619 361,2639 361,2801 344,2818 303,2818 288,2833 288,2944 309,2965 523,2965 525,2963 538,2963 566,2935 566,2558 518,2510 238,2510 221,2493
  region net VBUS: 1101,2729 1103,2727 1103,2687 1108.46,2681.54 1157.54,2681.54 1181,2705 1221,2705 1226,2700 1226,2610 1220,2604 1174,2604 1148,2630 1088,2630 1081,2637 1081,2727 1083,2729
  region net GND: 1249,2853 1240,2862 1240,2952 1250,2962 1298,2962 1305,2955 1305,2864 1294,2853
  region net GND: 1249,2452 1240,2443 1240,2360 1248,2352 1297,2352 1305,2360 1305,2441 1294,2452
  region net GND: 1133,2691 1136,2688 1155,2688 1178,2711 1224,2711 1233,2702 1233,2610 1239,2604 1295,2604 1301,2610 1301,2726 1289,2738 1171,2738 1162,2729 1136,2729 1133,2726
  region net VCC12V: 19,398.57 12,391.57 12,345.57 18,339.57 195,339.57 203,347.57 203,390.57 195,398.57 133,398.57
  region net GND: 19,497 12,490 12,444 18,438 195,438 203,446 203,489 195,497 133,497
  region net GND: 116,997 105,986 105,934 119,920 405,920 416,931 416,987 406,997
  region net GND: 187,1992 195,1984 195,1852 184,1841 130,1841 118.36,1852.64 118.36,1983.36 127,1992 172,1992
  region net GND: 329,1634 333,1630 374,1630 379,1635 379,1706 384,1711 459,1786 459,1885 459,1983 450,1992 361,1992 353,1984 353,1844 353,1761 334,1742 329,1737
  region net VCC1V0: 1183,2853 1139,2897 1016,2897 1010,2903 1010,2958 1015,2963 1219,2963 1230,2952 1230,2860 1223,2853 1219,2853
  region net VCC3V3: 1184,2452 1140,2408 1017,2408 1011,2402 1011,2347 1016,2342 1220,2342 1231,2353 1231,2445 1224,2452 1220,2452
  region net NetL3_2: 1129,2618 1126,2621 1115,2621 1110,2621 1107,2618 1107,2577 1103,2573 1020,2573 1011,2564 1011,2468 1015,2464 1160,2464 1165,2469 1165,2565 1157,2573 1133,2573 1129,2577
  region net NetL2_2: 1129,2690 1126,2687 1115,2687 1110,2687 1107,2690 1107,2731 1103,2735 1020,2735 1011,2744 1011,2840 1015,2844 1160,2844 1165,2839 1165,2743 1157,2735 1133,2735 1129,2731
  region net VCC5V: 118,1206 99,1187 99,1031 119,1011 411,1011 427,1027 427,1188 409,1206 407,1206
  region net VCC5V: 387,1658 383,1654 383,1633 387,1629 425,1629 429,1633 429,1655 426,1658
  region net NetR1_1: 303,1622 307,1618 307,1577 289,1559 224,1559 218,1553 147,1553 143,1557 143,1594 150,1601 275,1601 284,1610 284,1619 287,1622
  region net NetC1_2: 319,1622 316,1619 316,1574 295,1553 231,1553 222,1544 222,1511 207,1496 132,1496 108,1472 108,1341 125,1324 428,1324 443,1324 475,1356 475,1464 475,1552 435,1592 380,1592 371,1601 371,1618 367,1622
  region net VCC12V: 44.68,2411.68 13,2380 13,2029 39,2003 193,2003 209,1987 209,1856 182,1829 182,1739 201,1720 274,1720 286,1708 286,1633 291,1628 319,1628 324,1633 324,1743 340,1759 340,2388 316.31,2411.68
SIGNAL (Bottom):
  region net VCC12V: 671.2,1564.77 677.2,1558.77 677.2,1429.77 666.2,1418.77 548.2,1418.77 539.2,1427.77 539.2,1558.77 545.2,1564.77
  region net VCC5V: 971.2,2670.03 977.2,2664.03 977.2,2535.03 966.2,2524.03 848.2,2524.03 839.2,2533.03 839.2,2664.03 845.2,2670.03
  region net VCC5V: 971.2,1564.77 977.2,1558.77 977.2,1429.77 966.2,1418.77 848.2,1418.77 839.2,1427.77 839.2,1558.77 845.2,1564.77
  region net VCC5V: 971.2,456.79 977.2,450.79 977.2,321.79 966.2,310.79 848.2,310.79 839.2,319.79 839.2,450.79 845.2,456.79
  region net VCC12V: 671.2,456.79 677.2,450.79 677.2,321.79 666.2,310.79 548.2,310.79 539.2,319.79 539.2,450.79 545.2,456.79
  region net VCC12V: 671.2,2670.03 677.2,2664.03 677.2,2535.03 666.2,2524.03 548.2,2524.03 539.2,2533.03 539.2,2664.03 545.2,2670.03
  region net LXO-A: 3139,621 3142,618 3142,610 3141,609 3111,609 3101,599 2987,599 2981,593 2981,566 2974,559 2911,559 2907,563 2907,616 2919,628 3076,628 3083,621 3130,621
  region net LXO-B: 3136.1,1372 3139.1,1369 3139.1,1361 3138.1,1360 3108.1,1360 3098.1,1350 2984.1,1350 2978.1,1344 2978.1,1317 2971.1,1310 2908.1,1310 2904.1,1314 2904.1,1367 2916.1,1379 3073.1,1379 3080.1,1372 3127.1,1372
  region net LXO-C: 3139,2132 3142,2129 3142,2121 3141,2120 3111,2120 3101,2110 2987,2110 2981,2104 2981,2077 2974,2070 2911,2070 2907,2074 2907,2127 2919,2139 3076,2139 3083,2132 3130,2132
  region net VCC1V2-B: 2911,1265 2903,1257 2903,1190 2912,1181 2937,1181 2944,1174 2944,1149 2967,1126 3065,1126 3074,1135 3074,1181 3063,1192 2996,1192 2992,1196 2992,1257 2984,1265
  region net VCC1V2-A: 2911,514 2903,506 2903,439 2912,430 2937,430 2944,423 2944,398 2967,375 3065,375 3074,384 3074,430 3063,441 2996,441 2992,445 2992,506 2984,514
  region net VCC1V2-C: 2911,2025 2903,2017 2903,1950 2912,1941 2937,1941 2944,1934 2944,1909 2967,1886 3065,1886 3074,1895 3074,1941 3063,1952 2996,1952 2992,1956 2992,2017 2984,2025

## Silkscreen, mask and mechanical layers (free items; w line width, h text height)
Top Overlay:
  region: 2830 vertices and 111 holes, not listed, extent 3016.57,243.25 3467.37,663.28
  text "misaka10039" at 1911,1361 h60
  text "Ver0.2" at 2484,1256 h60
  text "2025/9/30" at 1901,1255 h60
  text "USB3.0 Gen2/10Gpbs" at 1904,455.99 h60
  text "Changeo Tec" at 1887,274.32 h100
Mechanical 1:
  lines w0.5: 0.25,319.8 ccw(c118.4,319.85) 118.36,201.69 3425.45,201.69 ccw(c3425.47,319.78) 3543.56,319.8 3543.56,2855.24 ccw(c3425.54,2855.33) 3425.45,2973.35 118.36,2973.35 ccw(c118.34,2855.26) 0.25,2855.24 0.25,319.8 ; 512.06,668.11 ccw(c630.15,668.09) 630.17,550 2638.05,550 ccw(c2638.14,668.02) 2756.16,668.11 2756.16,1101.57 ccw(c2638.14,1101.67) 2638.05,1219.69 630.17,1219.68 ccw(c630.15,1101.6) 512.06,1101.57 512.06,668.11 ; 512.06,1776.06 ccw(c630.21,1776.11) 630.17,1657.95 2638.05,1657.95 ccw(c2638.07,1776.04) 2756.16,1776.06 2756.16,2209.57 ccw(c2638.07,2209.59) 2638.05,2327.68 630.17,2327.68 ccw(c630.21,2209.52) 512.06,2209.57 512.06,1776.06